# EAGLE board BATT_DCDC (1) (EAGLE 9.5.2)
REV: C
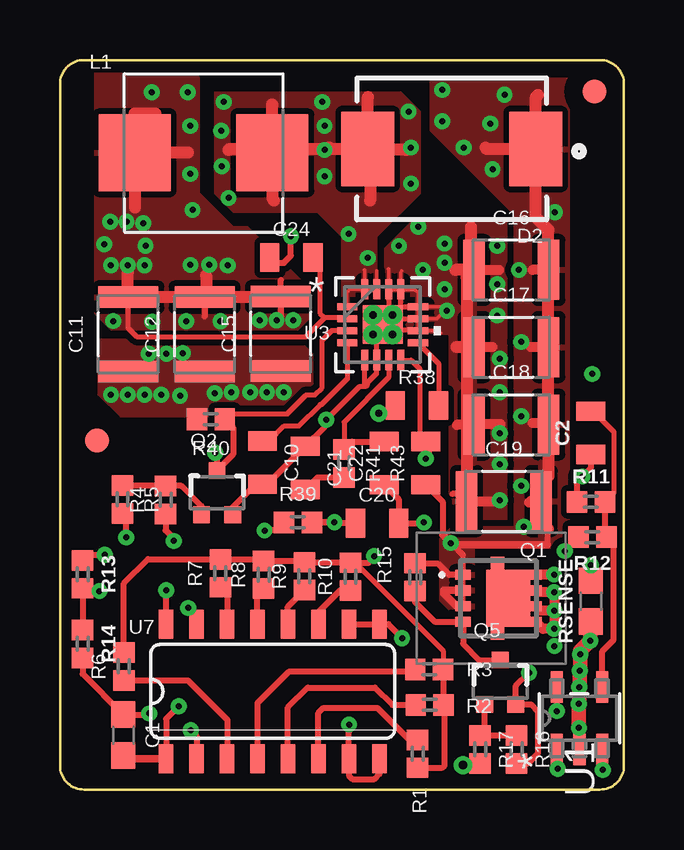
[diagram p0: board, top side]
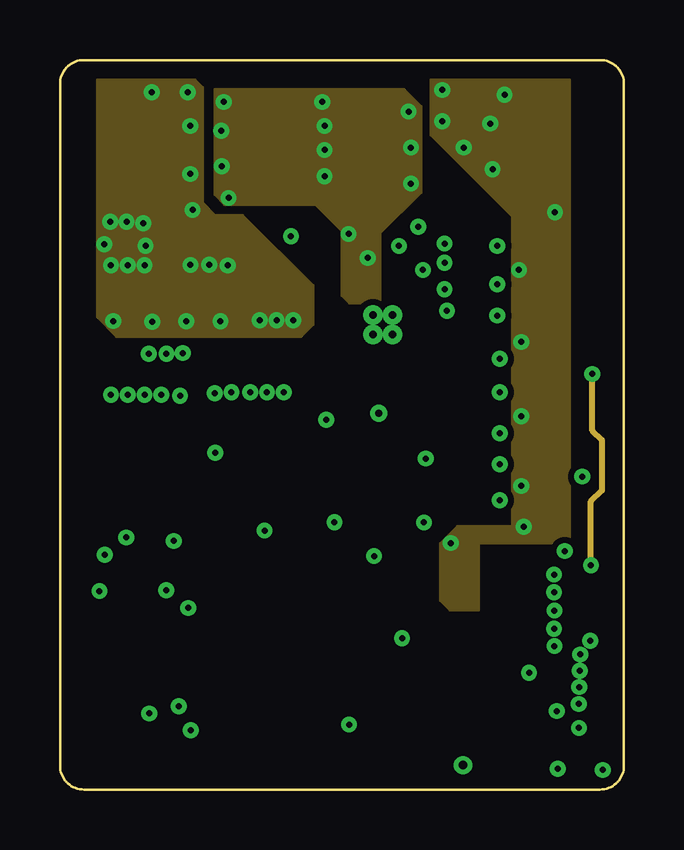
[diagram p1: board, inner layer Route2]
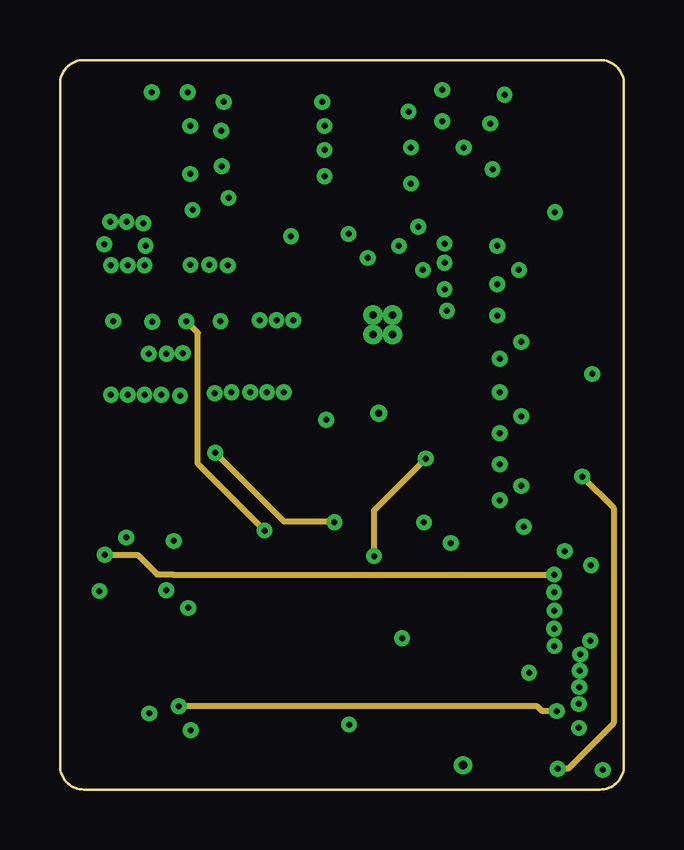
[diagram p2: board, inner layer Route15]
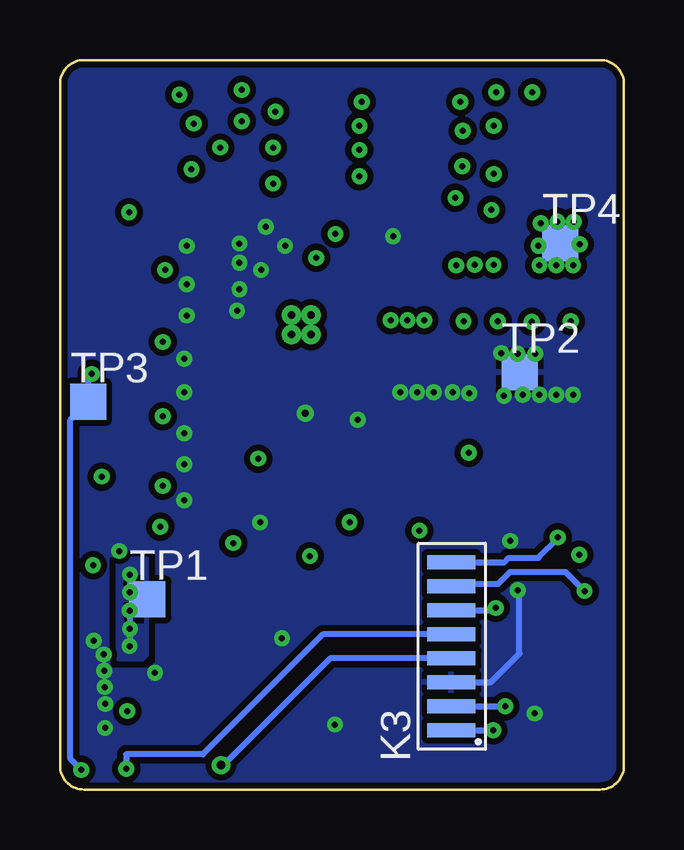
[diagram p3: board, bottom side, seen from below]

Size 23.5 x 30.4 mm. Coordinates in mm from the lower left corner, seen from the top.
Outline: 0,1 0,29.4 arc-90 1,30.4 22.5,30.4 arc-90 23.5,29.4 23.5,1 arc-90 22.5,0 1,0 arc-90 0,1
Copper layers (1+2*15+16): Top 0.035mm / dielectric 1.5mm / Route2 0.035mm / dielectric 0.15mm / Route15 0.035mm / dielectric 0.2mm / Bottom 0.035mm
Design rules "adafruit *": minimum track width 0.15mm, minimum drill 0.25mm, track to track 8mil, track to pad 8mil, pad to pad 8mil, via to via 8mil, smd to smd 8mil, copper to edge 10mil, drill to drill 8mil, minimum pad ring 10mil, minimum via ring 8mil, stop-mask expansion 2mil, vias tented up to drill 20mil, thermal gap 10mil
Net classes: 2 gnd: width 0.305 mm, drill 0.483 mm, clearance 0.203 mm
tRestrict: area -2.3,7.4 to -1.9,10.2; area -1.6,12.6 to 3.4,13; area 2.9,10.2 to 3.4,12.8

## Footprints (pad centres in the part's own frame; a part is rotated, then mirrored left to right if it is on the bottom)
0603 = smd 1.1 x 1: 1 -0.85,0; 2 0.85,0
0805@1 = smd 0.8 x 1.2: 1 -0.9,0; 2 0.9,0
WCAP-CSGP_1210 = smd 0.9 x 2.5: 1 -1.55,0; 2 1.55,0
DIOM7959X250N = smd 2.2 x 3.1: A 3.5,0; C -3.5,0
FLEX8 = smd 0.6 x 2: 1 -3.5,0.25; 2 -2.5,0.25; 3 -1.5,0.25; 4 -0.5,0.25; 5 0.5,0.25; 6 1.5,0.25; 7 2.5,0.25; 8 3.5,0.25
INDM7366X500 = smd 3 x 3.2: 1 -2.87,0; 2 2.87,0
NVTFS5124PLTWG = smd 0.42 x 0.66: 1 -0.975,-1.47; 2 -0.325,-1.47; 3 0.325,-1.47; 4 0.975,-1.47 | smd 0.42 x 0.47: 5 0.975,1.565; 6 0.325,1.565; 7 -0.325,1.565; 8 -0.975,1.565 | smd 2.37 x 1.83: 9 0,0.415 | smd 0.545 x 0.57: 10 1.458,-0.035; 11 -1.458,-0.035
SOT323 = smd 0.7 x 0.7: 1 -0.65,-0.925; 2 0.65,-0.925; 3 0,0.925
0402 = smd 0.85 x 0.9: 1 -0.58,0; 2 0.58,0
0805 = smd 0.8 x 1.2: 1 -0.9,0; 2 0.9,0
TESTPAD_TP15SQ = smd 1.5 x 1.5: TP 0,0
SOT-23-5_MC_MCH = smd 1.31 x 0.508: 1 -1.295,0.95; 2 -1.295,0; 3 -1.295,-0.95; 4 1.295,-0.95; 5 1.295,0.95
RTE16_1P66X1P66_TEX = smd 0.85 x 0.28: 1 -1.475,0.75; 2 -1.475,0.25; 3 -1.475,-0.25; 4 -1.475,-0.75; 9 1.475,-0.75; 10 1.475,-0.25; 11 1.475,0.25; 12 1.475,0.75 | smd 0.28 x 0.85: 5 -0.75,-1.475; 6 -0.25,-1.475; 7 0.25,-1.475; 8 0.75,-1.475; 13 0.75,1.475; 14 0.25,1.475; 15 -0.25,1.475; 16 -0.75,1.475 | smd 1.66 x 1.6: 17 0,0 | drill 0.305 pad 0.508: V -0.406,-0.406; V_1 -0.406,0.406; V_2 0.406,-0.406; V_3 0.406,0.406
SO16 = smd 0.6 x 1.2: 1 -4.445,-2.8; 2 -3.175,-2.8; 3 -1.905,-2.8; 4 -0.635,-2.8; 5 0.635,-2.8; 6 1.905,-2.8; 7 3.175,-2.8; 8 4.445,-2.8; 9 4.445,2.8; 10 3.175,2.8; 11 1.905,2.8; 12 0.635,2.8; 13 -0.635,2.8; 14 -1.905,2.8; 15 -3.175,2.8; 16 -4.445,2.8
FIDUCIAL_1MM = smd 1 x 1: 1 0,0

## Placement (x,y rotation side)
C1  10uF  [0603]  2.64,2.27 270 top
C2  100n 50V  [0805@1]  22.11,14.86 90 top
C10  47n 35V  [0805@1]  8.43,13.62 270 top
C11  47uF 16V  [WCAP-CSGP_1210]  2.84,18.97 90 top
C12  47uF 16V  [WCAP-CSGP_1210]  6.02,18.97 90 top
C15  47uF 16V  [WCAP-CSGP_1210]  9.2,18.99 90 top
C16  47uF 25V  [WCAP-CSGP_1210]  18.8,21.65 0 top
C17  47uF 25V  [WCAP-CSGP_1210]  18.8,18.43 0 top
C18  47uF 25V  [WCAP-CSGP_1210]  18.8,15.21 0 top
C19  47uF 25V  [WCAP-CSGP_1210]  18.49,12.02 0 top
C20  47n 35V  [0805@1]  13.21,11.1 0 top
C21  100n 50V  [0805@1]  10.22,13.4 270 top
C22  270p 50V  [0805@1]  13.51,13.6 90 top
C24  100n 50V  [0805@1]  9.64,22.17 0 top
D2  B520C-13-F  [DIOM7959X250N]  16.32,26.69 180 top
K3  FLEX8  [FLEX8]  6.94,5.97 90 bottom
L1  2.2uH - 74437346022  [INDM7366X500]  5.98,26.53 0 top
Q1  NVTFS9D6P04M8LTAG  [NVTFS5124PLTWG]  18.26,7.97 270 top
Q2  2N7002PW  [SOT323]  6.54,12.37 0 top
Q5  2N7002PW  [SOT323]  18.34,4.47 0 top
R1  [0402]  14.9,1.49 270 top
R2  [0402]  15.4,3.53 0 top
R3  [0402]  15.38,5.01 0 top
R4  470k  [0402]  4.4,12.07 90 top
R5  33R  [0402]  2.6,12.09 270 top
R6  [0402]  2.66,5.13 90 top
R7  [0402]  6.68,9.01 90 top
R8  [0402]  8.48,8.95 90 top
R9  [0402]  10.18,8.89 90 top
R10  [0402]  12.1,8.87 90 top
R11  15k  [0402]  22.12,11.99 0 top
R12  1k  [0402]  22.18,10.52 180 top
R13  15k  [0402]  0.94,8.97 270 top
R14  15k  [0402]  0.94,6.07 270 top
R15  [0402]  14.79,8.85 90 top
R16  [0402]  19.02,1.67 270 top
R17  [0402]  17.5,1.67 270 top
R38  [0805]  14.87,16 0 top
R39  78.7k  [0402]  9.91,11.13 0 top
R40  78.7k  [0402]  6.28,15.43 180 top
R41  1.87k  [0402]  11.83,13.59 270 top
R43  78.7k  [0805]  15.24,13.6 90 top
RSENSE  10mR  [0603]  22.12,7.85 90 top
TP1  TESTPAD_TPSQTP15SQ  [TESTPAD_TP15SQ]  19.86,7.92 0 bottom
TP2  TESTPAD_TPSQTP15SQ  [TESTPAD_TP15SQ]  4.35,17.38 0 bottom
TP3  TESTPAD_TPSQTP15SQ  [TESTPAD_TP15SQ]  22.32,16.15 0 bottom
TP4  TESTPAD_TPSQTP15SQ  [TESTPAD_TP15SQ]  2.66,22.77 0 bottom
U1  MCP6071T-E/OT  [SOT-23-5_MC_MCH]  21.64,2.97 90 top
U3  TPS55330RTET  [RTE16_1P66X1P66_TEX]  13.44,19.37 0 top
U7  TPIC2810D  [SO16]  8.86,4.09 0 top
U$34  FIDUCIAL""  [FIDUCIAL_1MM]  1.55,14.55 0 top
U$35  FIDUCIAL""  [FIDUCIAL_1MM]  22.27,29.08 270 top

## Library data of the parts
C1 = SparkFun-Capacitors; PROD_ID: CAP-11015
C2 C10 C20-C22 C24 = SparkFun-Capacitors; PROD_ID: CAP-14259
C11 C12 C15-C19 = Wurth_Elektronik_Passive_Capacitors_rev19a; WE-NUMBER: 885012109003/47uF
D2 = B520C-13-F; AVAILABILITY: Unavailable; DESCRIPTION: Diode Schottky 20V 5A Surface Mount SMC; DIGIKEY-PURCHASE-URL: https://snapeda.com/shop?store=DigiKey&id=325969; MF: Diodes Inc.; MP: B520C-13-F; PACKAGE: DO-214 Diodes Inc.; PRICE: None
K3 = Flex_Faja_connector
L1 = Inductance_2.2uH; DESCRIPTION: 10µH Shielded Molded Inductor 3.2A 69mOhm Max Nonstandard; DIGIKEY-PURCHASE-URL: https://snapeda.com/shop?store=DigiKey&id=586788; MF: Wurth Electronics; MP: 74437349100; PACKAGE: Nonstandard Wurth Electronics
Q1 = SamacSys_Parts; DESCRIPTION: MOSFET MV8 P INITIAL PROGRAM; HEIGHT: 0.8mm; MANUFACTURER_NAME: ON Semiconductor; MANUFACTURER_PART_NUMBER: NVTFS9D6P04M8LTAG; MOUSER_PART_NUMBER: 863-NVTFS9D6P04M8LTG; MOUSER_PRICE-STOCK: https://www.mouser.co.uk/ProductDetail/ON-Semiconductor/NVTFS9D6P04M8LTAG/?qs=xZ%2FP%252Ba9zWqYALd8g5rll2Q%3D%3D
Q2 Q5 = SparkFun-DiscreteSemi; PROD_ID: TRANS-11151
R1-R17 R38-R41 R43 RSENSE = SparkFun-Resistors
TP1-TP4 = BeagleBone_Blue_R3
U1 = MCP6071; BUILT_BY: EMA_Jessica; COPYRIGHT: Copyright (C) 2018 Accelerated Designs. All rights reserved; MANUFACTURER_PART_NUMBER: MCP6071T-E/OT; SOURCELIBRARY: Microchip_2019-08-23_21; VENDOR: Microchip
U3 = TPS55330; BUILT_BY: EMA_UL_Team; MANUFACTURER_PART_NUMBER: TPS55330RTET; SOURCELIBRARY: TI_2015-1-5; VENDOR: Texas Instruments
U7 = EDCPSU - Rev2
U$34 U$35 = microbuilder; BOM: EXCLUDE

## Nets
#EN_DCDC: K3.8 R5.2
COMP_TPS: C22.2 R41.1 U3.7
EN_TPS: C20.1 Q2.3 R39.2 R40.1 U3.3
FB_TPS: R1.2 R2.2 R3.2 R6.2 R7.2 R8.2 R9.2 R10.2 R43.2 U3.8
FREQ_TPS: R38.2 U3.9
GND: C1.1 C10.2 C11.1 C12.1 C15.1 C16.1 C17.1 C18.1 C19.1 C20.2 C21.1 C22.1 C24.1 K3.3 Q2.2 Q5.2 R4.1 R12.2 R14.2 R16.2 R38.1 R40.2 RSENSE.1 TP2.TP U1.2 U3.5 U3.6 U3.10 U3.11 U3.12 U3.13 U3.14 U3.17 U7.7 U7.8 U7.9 U7.10 U7.16
ISENSE_RAW: C2.1 K3.5 R11.1 U1.1
N$1: C2.2 R11.2 R12.1 U1.4
N$2: R1.1 U7.6
N$3: R2.1 U7.5
N$4: Q2.1 R4.2 R5.1
N$5: R3.1 U7.4
N$6: R6.1 U7.3
N$7: R7.1 U7.14
N$8: Q1.4 Q5.3 R15.1
N$9: R8.1 U7.13
N$10: R9.1 U7.12
N$11: R10.1 U7.11
N$13: Q5.1 R16.1 R17.1
N$35: C10.1 U3.4
N$43: C21.2 R41.2
OP_SWITCH: K3.4 R17.2
SCL: K3.6 U7.15
SDA: K3.1 U7.2
SW2_TPS: D2.A L1.2 U3.1 U3.15 U3.16
VCC: C1.2 K3.2 U1.5 U7.1
VOUT+: Q1.5 Q1.6 Q1.7 Q1.8 Q1.9 Q1.10 Q1.11 R13.1 TP1.TP
VOUT-: RSENSE.2 TP3.TP U1.3
VOUTSENSE: K3.7 R13.2 R14.1
VSOURCE: C16.2 C17.2 C18.2 C19.2 D2.C Q1.1 Q1.2 Q1.3 R15.2 R43.1
VSYS: C11.2 C12.2 C15.2 C24.2 L1.1 R39.1 TP4.TP U3.2

## Tracks (layer width: path | path; a pad name or v marks a point on that pad's centre or on a via)
#EN_DCDC  (via drill 0.25)
  Top 0.254: v2.76,10.51 2.76,11.36 R5.2
  Bottom 0.254: K3.8 4.99,9.47 4.81,9.65 3.56,9.65 2.73,10.48 v2.76,10.51
COMP_TPS
  Top 0.203: U3.7 13.69,17.17 11.83,15.31 R41.1
  Top 0.254: R41.1 12.16,14.5 C22.2
EN_TPS  (via drill 0.25)
  Top 0.2: 7.69,15.65 8.4,15.65
  Top 0.203: U3.3 11.32,19.13 10.92,18.73 10.92,16.75 10.62,16.45 10.24,16.45 10.24,16.42 9.47,15.65 8.4,15.65 | 7.69,15.65 7.08,15.65 R40.1
  Top 0.254: C20.1 11.51,11.1 11.48,11.13 R39.2 v11.43,11.14 | R40.1 7.21,15.08 7.21,13.97 Q2.3 6.54,13.91 6.44,14.01 v6.46,14.03
  Route15 0.254: v6.46,14.03 9.32,11.17 11.43,11.17 v11.43,11.14
FB_TPS  (via drill 0.25)
  Top 0.203: U3.8 14.63,17.9 14.98,17.54 14.98,14.76 R43.2 | R10.2 12.13,9.42 12.33,9.42 15.96,5.79 R3.2
  Top 0.254: R3.2 15.96,3.55 R2.2 16.02,3.49 16.02,1 15.93,0.91 R1.2 | R6.2 2.66,8.59 3.67,9.6 R7.2 8.42,9.59 R8.2 10.12,9.53 R9.2 12.08,9.47 R10.2 12.84,9.45 13.08,9.69 v13.08,9.73 | v15.24,13.79 15.36,13.91 15.36,14.38 R43.2
  Route15 0.254: v13.08,9.73 13.08,11.63 v15.24,13.79 v15.25,13.8
FREQ_TPS
  Top 0.203: U3.9 14.92,18.61 15.77,17.75 R38.2
GND  (via drill 0.25, 0.3)
  Top 0.15: 14.17,20.83 13.71,20.83 U3.14 13.69,21.7 13.68,21.71 | U3.12 14.92,20.7 14.78,20.83 14.21,20.83 U3.13 14.19,21.56 14.24,21.61 | U3.12 U3.11 | U3.11 14.92,19.14 14.91,19.13 | U3.12 16.18,20.11 16.02,19.95 | 16.02,19.95 v16.12,19.95 | U3.11 15.69,19.62 16.02,19.95 | U3.10 15.75,19.12 15.86,19.01
  Top 0.2: U3.6 13.19,18.64 13.18,18.63 13.18,19.11 U3.17 | U3.14 13.7,20.84 13.7,19.63 U3.17 | U3.13 14.17,20.83 14.17,19.97 13.58,19.37 U3.17 | U3.17 14.19,20.12 U3.12 | U3.17 13.69,19.62 U3.11 | U3.17 13.68,19.13 14.91,19.13 U3.10 | 11.02,15.4 11.03,15.41 v11.1,15.41 v11.1,15.42 12.47,16.79 12.73,16.79 12.8,16.86
  Top 0.203: R38.1 13.72,15.75 13.28,15.75 v13.28,15.68 | U3.5 12.69,16.84 12.8,16.95 | U3.6 13.19,17.34 12.8,16.95 | 12.8,16.95 12.8,16.86
  Top 0.254: U7.10 U7.9 13.68,6.89 v14.26,6.31 v14.25,6.3 | C24.1 8.96,21.95 9.32,21.95 9.62,22.25 v9.62,23.05 | 11.02,15.4 11.02,15.1 C21.1 8.64,12.72 C10.2 8.29,12.86 7.19,11.76 Q2.2 | R4.1 4.4,10.8 4.77,10.43 4.77,10.39 v4.74,10.36 | U7.16 4.42,8.19 4.44,8.21 4.44,8.29 v4.42,8.31 | v3.72,3.17 3.67,3.12 C1.1 0.94,4.82 R14.2 | U7.8 13.31,0.66 13.08,0.43 12.18,0.43 12.04,0.58 U7.7 12.04,2.43 12.06,2.45 12.06,2.69 v12.04,2.71 | R16.2 19.5,1.09 19.9,1.49 19.9,3.27 19.63,3.55 Q5.2 18.99,4.32 v19.54,4.87 | C22.1 14.11,12.1 C20.2 15.14,11.1 v15.17,11.13 | U1.2 21.64,2.49 21.67,2.52 v21.62,2.57 | R12.2 21.05,9.97 21.05,9.94 v21.03,9.94 | C19.1 16.64,12.32 16.35,12.32
  Top 0.406: C19.1 18.14,12.02 18.17,12.05 18.34,12.05 | 18.34,15.23 17.27,15.23 C18.1 16.56,15.21 16.54,15.19 | C17.1 17.27,18.45 18.02,18.45 | C16.1 18.28,21.65
  Top 0.508: C16.1 17.12,21.78 17.12,23.45 | C16.1 16.94,21.34 C19.1 | C17.1 16.52,18.43 | C16.1 16.48,21.65
  Top 0.61: RSENSE.1 22.09,6.97 v22.09,6.2 21.67,5.78 v21.67,5.63 21.67,4.97 v21.65,4.95 21.65,4.29 v21.63,4.27 21.63,3.59 v21.61,3.57 v21.62,3.56 v21.62,2.57
  Bottom 0.2: v4.43,18.16 4.43,17.46 TP2.TP 4.35,17.43 v5.11,18.19
  Bottom 0.203: v13.28,15.68 13.22,15.74 | 11.15,15.46 v11.1,15.41
  Bottom 0.254: K3.3 5.55,4.47 4.36,5.66 4.36,8.25 v4.42,8.31
  other vias: 2.12,16.45 2.82,16.45 3.52,16.45 4.22,16.45 5,16.41 6.44,16.51 7.14,16.55 7.92,16.55 8.62,16.55 9.32,16.55 14.12,22.65 14.92,23.45 16.02,22.75 16.02,21.95 15.12,21.65 16.02,20.85 18.22,22.65 18.22,21.05 18.22,19.75 18.32,17.95 18.32,16.55 18.32,14.85 18.32,13.55 18.32,12.05 3.69,18.16
  pour Top (isolate 0.254): 18.62,23.85 18.62,11.25 16.22,11.25 16.22,18.95 13.92,18.95 13.52,19.35 13.52,22.55 14.82,23.85
  pour Top (isolate 0.254, no thermals): 1.62,18.75 1.62,16.45 2.52,15.55 9.42,15.55 10.72,16.85 10.72,17.95 9.92,18.75
  pour Bottom (isolate 0.254, rank 2): 0.34,29.77 0.34,0.57 0.74,0.17 22.74,0.17 23.14,0.57 23.34,0.77 23.34,29.57 22.74,30.17 0.74,30.17
ISENSE_RAW  (via drill 0.25)
  Top 0.254: v20.74,0.87 20.74,1.63 U1.1 | R11.1 21.54,12.8 21.71,12.97 21.71,12.99 v21.76,13.04 22.11,13.39 C2.1
  Route15 0.254: v21.76,13.04 23.07,11.74 23.07,2.77 21.17,0.87 v20.74,0.87
  Bottom 0.254: K3.5 12.54,6.47 17.54,1.47 20.74,1.47 v20.74,0.87
N$1
  Top 0.2: R11.2 23.08,12.37 23.08,14.89 22.21,15.76 C2.2
  Top 0.254: 22.63,10.39 R12.1 | U1.4 22.59,5.77 23.07,6.25 23.07,10.22 R12.1 | R11.2 22.7,10.58 R12.1
N$2
  Top 0.254: U7.6 10.77,3.2 10.97,3.4 13.22,3.4 14.55,2.07 R1.1
N$3
  Top 0.254: U7.5 9.5,3.43 10.32,4.25 13.12,4.25 13.84,3.53 R2.1
N$4
  Top 0.254: Q2.1 5.89,11.81 5.05,12.65 R4.2 | R5.1 4.38,12.67
  Top 0.305: 4.38,12.67 R4.2
N$5
  Top 0.254: R3.1 14.69,4.9 9.52,4.9 8.22,3.6 U7.4
N$6
  Top 0.254: R6.1 5.32,4.55 6.97,2.9 6.97,1.31 U7.3
N$7
  Top 0.254: R7.1 6.96,8.16 U7.14
N$8
  Top 0.254: Q5.3 17.48,5.4 16.79,6.08 Q1.4 15.61,7 14.79,7.81 R15.1
N$9
  Top 0.254: U7.13 8.23,8.12 R8.1
N$10
  Top 0.254: U7.12 9.5,7.63 R9.1
N$11
  Top 0.254: U7.11 10.77,7.4 11.66,8.29 R10.1
N$13
  Top 0.254: R16.1 R17.1 17.69,2.44 Q5.1
N$35
  Top 0.203: C10.1 8.71,14.52 9.34,15.15 9.95,15.15 10.84,16.04 10.89,16.04 11.97,17.12 U3.4
N$43
  Top 0.254: C21.2 10.73,13.01 R41.2
OP_SWITCH  (via drill 0.35)
  Top 0.254: v16.79,1.02 17.43,1.02 R17.2
  Bottom 0.254: K3.4 12.24,5.47 16.74,0.97 v16.79,1.02
SCL  (via drill 0.25)
  Top 0.254: v5.34,7.57 5.69,7.23 U7.15
  Bottom 0.254: K3.6 5.34,7.47 v5.34,7.57
SDA  (via drill 0.25)
  Top 0.254: v5.44,2.47 5.69,2.23 U7.2
  Bottom 0.254: K3.1 v5.44,2.47
SW2_TPS  (via drill 0.25)
  Top 0.15: U3.1 11.94,20.15 11.94,20.71 12.08,20.85 U3.16 | U3.16 U3.15 13.19,21.6 13.2,21.61 | U3.16 12.69,21.64 12.68,21.65
  Top 0.508: D2.A 11.28,26.69 | 11.28,26.69 11.22,26.75 | D2.A 14.38,26.69 14.42,26.65 | D2.A 12.82,28.85 | D2.A 12.92,26.59 12.92,24.55 | 11.28,26.69 7.06,26.69 7.02,26.65 | 8.82,28.55 8.85,28.52 L1.2 8.85,24.62 8.92,24.55
  other vias: 6.82,28.65 10.92,28.65 11.02,25.55 14.52,28.25 14.62,25.25 12.02,23.15 12.82,22.15 7.02,24.65 6.72,27.45 6.74,25.97 11.02,27.65 14.62,26.75 11.02,26.65
  pour Top (isolate 0.254, rank 2): 6.42,29.05 6.42,24.85 7.22,24.05 10.72,24.05 11.72,23.05 11.72,20.05 13.22,20.05 13.22,23.05 15.02,24.85 15.02,28.25 14.22,29.05
  pour Route2 (isolate 0.254, no thermals): 6.44,29.17 6.44,24.78 6.85,24.37 10.64,24.37 11.74,23.27 11.74,20.57 12.04,20.27 13.34,20.27 13.34,23.17 15.04,24.87 15.04,28.47 14.34,29.17
VCC  (via drill 0.25)
  Top 0.254: v4.94,3.47 4.42,2.95 U7.1 | U1.5 v20.69,3.27
  Top 0.305: C1.2 2.77,1.29 U7.1
  Route15 0.254: v20.69,3.27 20.09,3.27 19.89,3.47 v4.94,3.47
  Bottom 0.254: K3.2 v4.94,3.47
VOUT+  (via drill 0.25)
  Top 0.2: Q1.6 19.61,7.65 18.94,8.31 | Q1.7 18.92,8.31
  Top 0.254: Q1.10 Q1.11 18.23,9.15 18.68,8.7 Q1.9 18.68,8.07 18.92,8.31 18.94,8.31 | Q1.8 19.18,8.95 19.18,8.63 19.52,8.3 Q1.7 | Q1.5 19.44,7 19.34,7.09 19.34,8.29 19.36,8.31 | R13.1 1.17,9.78 v1.86,9.78
  Top 0.406: v20.58,8.96 v20.57,8.95 Q1.8 | Q1.7 19.9,8.22 v20.58,8.22 20.58,7.48 v20.6,7.46 | v20.6,7.46 20.01,7.46 Q1.6 | Q1.5 20.12,6.7 v20.58,6.7 20.6,6.72 v20.6,7.46
  Route15 0.254: v1.86,9.78 3.23,9.78 4.05,8.97 4.7,8.97 4.7,8.96 v20.58,8.96
  Bottom 0.254: v20.58,8.96 v20.58,8.22 | v20.6,7.46 20.14,7.92 TP1.TP 20.58,7.2 v20.58,6.7 20.6,6.68 v20.6,5.98
  pour Bottom (isolate 0.2): 19.84,9.67 19.84,5.57 19.94,5.47 20.04,5.37 21.04,5.37 21.14,5.47 21.14,5.87 21.14,9.57 21.04,9.67
VOUT-  (via drill 0.25)
  Top 0.254: U1.3 22.61,1.66 v22.61,0.82 | RSENSE.2 v22.12,9.35 v22.13,9.36
  Route2 0.254: v22.12,9.35 22.12,12.01 22.58,12.47 22.58,14.56 22.18,14.96 v22.18,17.32 v22.17,17.32
  Bottom 0.254: v22.61,0.82 23.07,1.28 23.07,15.41 TP3.TP 22.32,17.17 v22.17,17.32
VOUTSENSE  (via drill 0.25)
  Top 0.254: v1.64,8.27 1.52,8.39 R13.2 R14.1
  Bottom 0.254: K3.7 7.09,8.57 5.24,8.57 4.74,9.07 2.44,9.07 v1.64,8.27
VSOURCE  (via drill 0.25)
  Top 0.15: Q1.1 Q1.3
  Top 0.203: Q1.1 16.79,9.77 | 16.22,10.34 16.25,10.37
  Top 0.254: R43.1 15.94,12 15.94,10.62 16.79,9.77 | Q1.1 16.21,8.95 15.76,9.4 14.82,9.4 R15.2 | C19.2 20.3,11.76 20.3,10.21
  Top 0.305: Q1.2 16,8.3 | 16,8.3 15.98,8.31 | Q1.3 16.53,7.65 16,8.18 16,8.3 | 20.3,10.21 16.35,10.21 15.94,10.62
  Top 0.406: C16.2 19.68,21.65 | C17.2 19.62,18.43 | C18.2 20.29,15.27 19.68,15.27 | C19.2 19.59,12.02 19.54,11.97
  Top 0.508: C19.2 20.04,11.13 20.32,10.85 | C18.2 20.35,13.08 20.36,13.07 | C17.2 20.32,18.4 20.32,16.35 | 20.32,19.25 20.32,21.62 C16.2 20.35,23.32 19.82,23.85 D2.C | D2.C 19.82,28.85 19.92,28.95 | D2.C 17.78,26.69 17.72,26.75
  other vias: 15.92,29.15 15.92,27.85 16.82,26.75 18.02,25.85 17.92,27.75 18.52,28.95 20.62,24.05 19.12,21.65 19.22,18.65 19.22,15.55 19.22,12.65 19.32,10.95 16.28,10.27
  pour Top (isolate 0.254, rank 2): 15.42,29.65 21.22,29.65 21.22,10.03 17.26,10.03 17.26,7.47 16.22,7.47 15.82,7.87 15.82,10.45 16.62,11.25 18.82,11.25 18.82,24.05 15.42,27.45
  pour Route2 (isolate 0.254, no thermals): 15.44,29.57 15.44,27.27 18.84,23.87 18.84,10.97 16.54,10.97 15.84,10.27 15.84,7.87 16.24,7.47 17.44,7.47 17.44,10.27 21.24,10.27 21.24,29.57
VSYS  (via drill 0.25)
  Top 0.203: C24.2 10.82,21.89 10.82,19.85 11.02,19.65 | U3.2 11.94,19.65 11.02,19.65 | C11.2 2.84,19.23 3.22,18.85 10.22,18.85 11.02,19.65
  Top 0.254: v8.52,10.79 8.56,10.83 9.31,10.83 9.33,10.86 R39.1 | 9.2,21.24 C15.2 9.2,19.73 v9.02,19.55 | C12.2 6.02,19.71
  Top 0.508: L1.1 3.13,26.55 5.32,26.55 | L1.1 3.11,28.17 3.98,28.17 | L1.1 3.12,24.25 | C15.2 9.18,20.52 C11.2 2.82,20.54 2.82,21.55 | C12.2 6.08,20.58 6.08,21.41
  Route15 0.254: v8.52,10.79 5.74,13.57 5.74,19.03 v5.26,19.51
  Bottom 0.152: v1.84,22.72 1.89,22.77 TP4.TP | v2.09,23.66 2.66,23.09 2.66,22.79 | v2.77,23.66 2.77,22.88 TP4.TP | v3.47,23.6 2.66,22.79 | v3.56,22.66 2.77,22.66 | 2.77,22.66 2.72,22.72 | 2.72,22.72 TP4.TP | v2.12,21.85 2.12,22.12 2.72,22.72 | v2.82,21.85 2.82,22.61 2.77,22.66 | v3.52,21.85 2.66,22.71 2.66,22.79
  other vias: 5.43,21.86 6.21,21.87 8.32,19.55 9.72,19.55 3.82,29.05 5.32,29.05 5.42,27.65 5.42,25.65 5.52,24.15 2.22,19.52 3.84,19.49 6.68,19.51 6.99,21.84
  pour Top (isolate 0.254, rank 2): 1.42,29.85 1.42,19.85 2.12,19.15 9.92,19.15 10.42,19.65 10.42,20.85 7.82,23.45 7.22,23.45 5.82,24.85 5.82,29.65 5.62,29.85
  pour Route2 (isolate 0.254, no thermals): 1.54,29.57 1.54,19.67 2.34,18.87 10.04,18.87 10.54,19.37 10.54,21.02 7.62,23.94 6.47,23.94 5.94,24.47 5.94,29.27 5.64,29.57